# Altium PCB Rajesh_Jasti_17978253_Lab1.PcbDoc
Units mil, origin at the board's own origin, x right, y up, seen from the top; angles counter-clockwise.
Board outline 1680 x 1200 mil, 2 copper layers (Top Layer, Bottom Layer); 33 components, 33 nets, 133 pads, 23 vias.
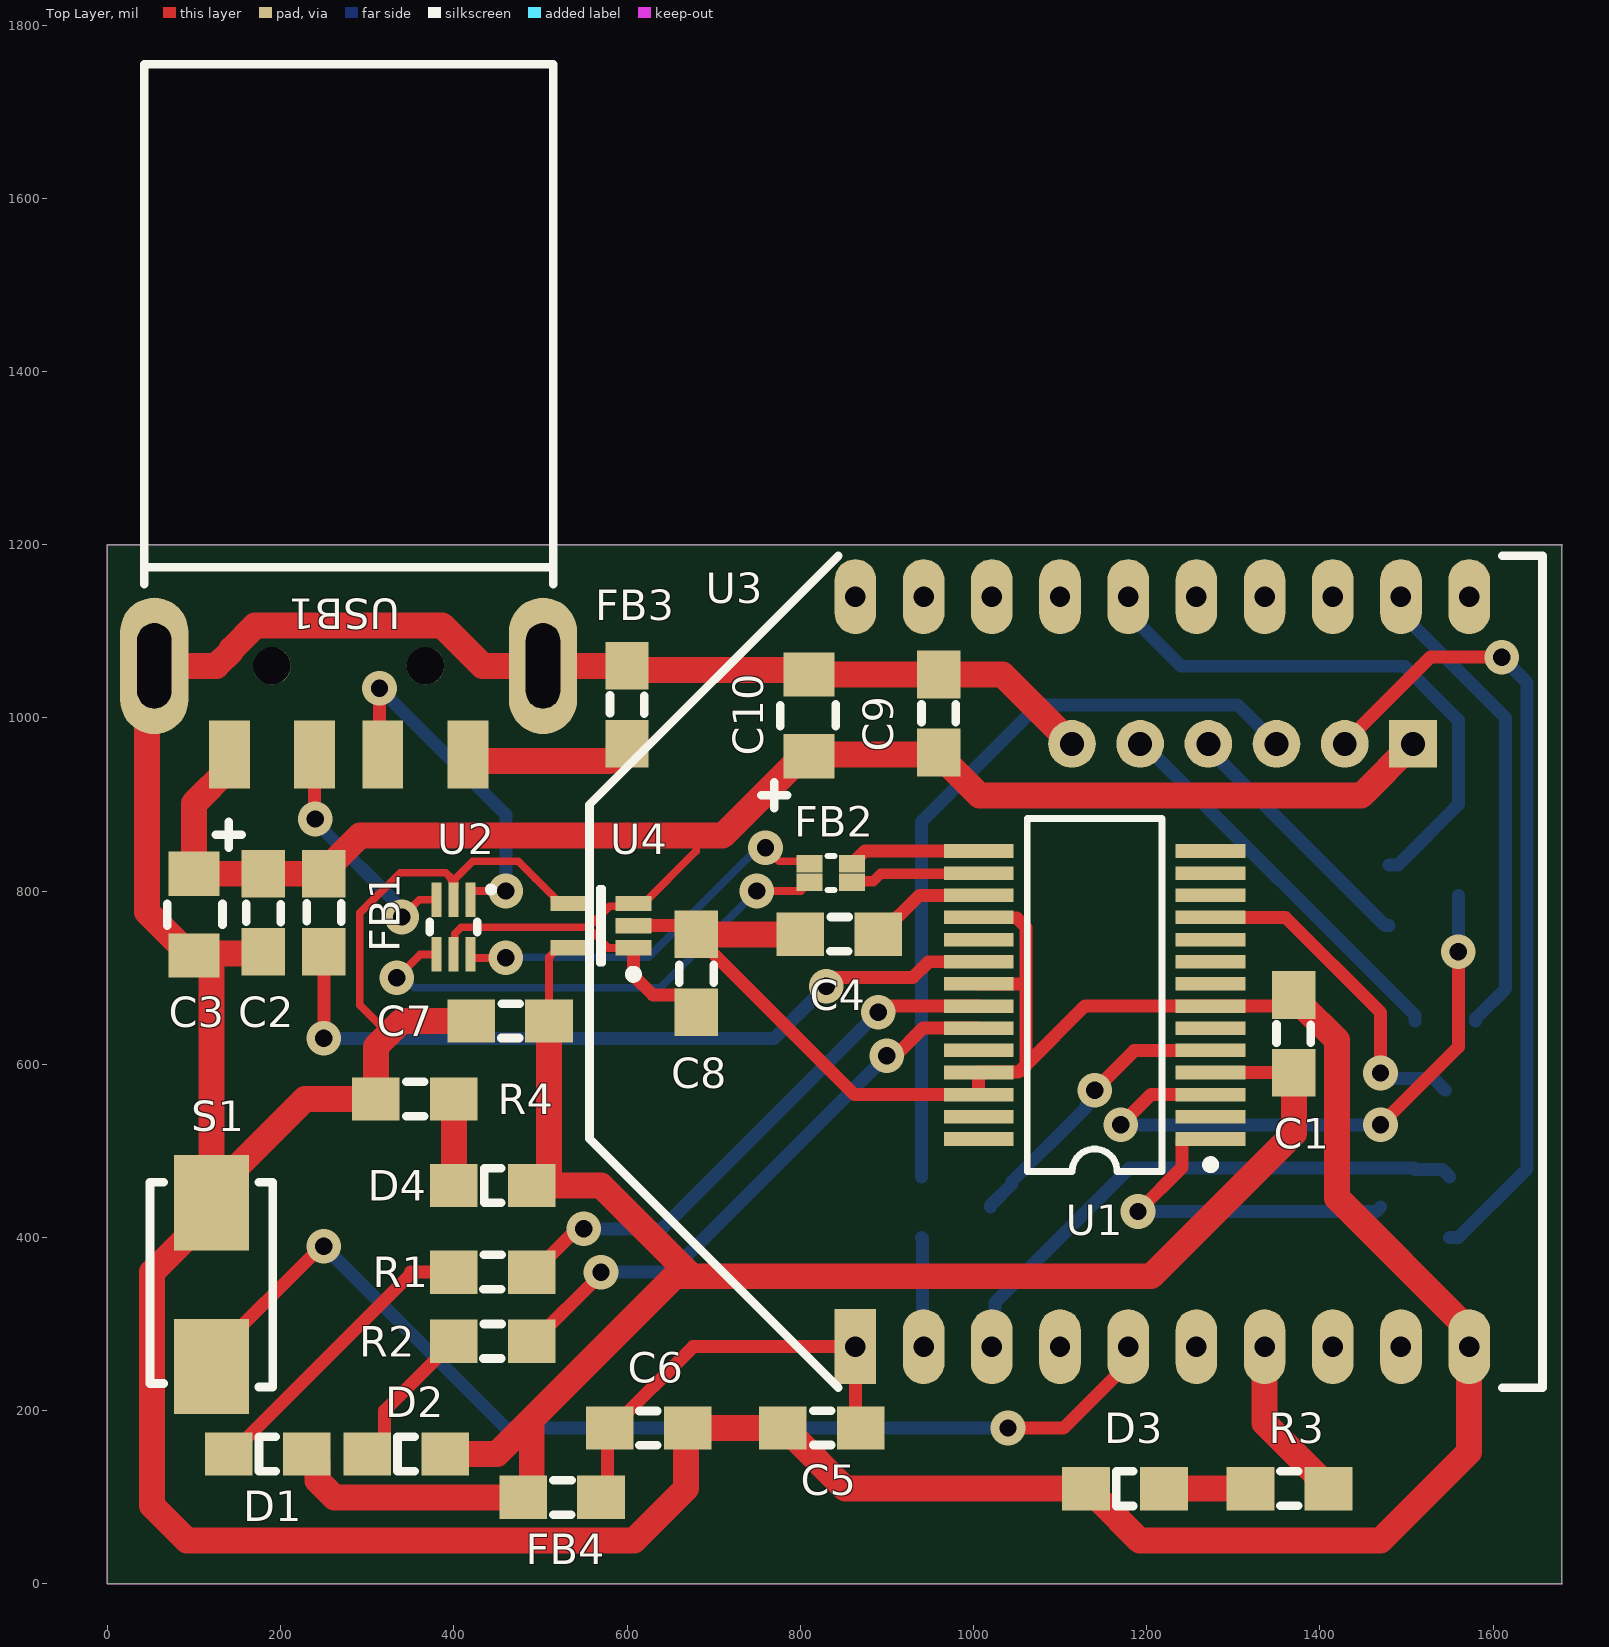
[diagram p0: Top Layer view]
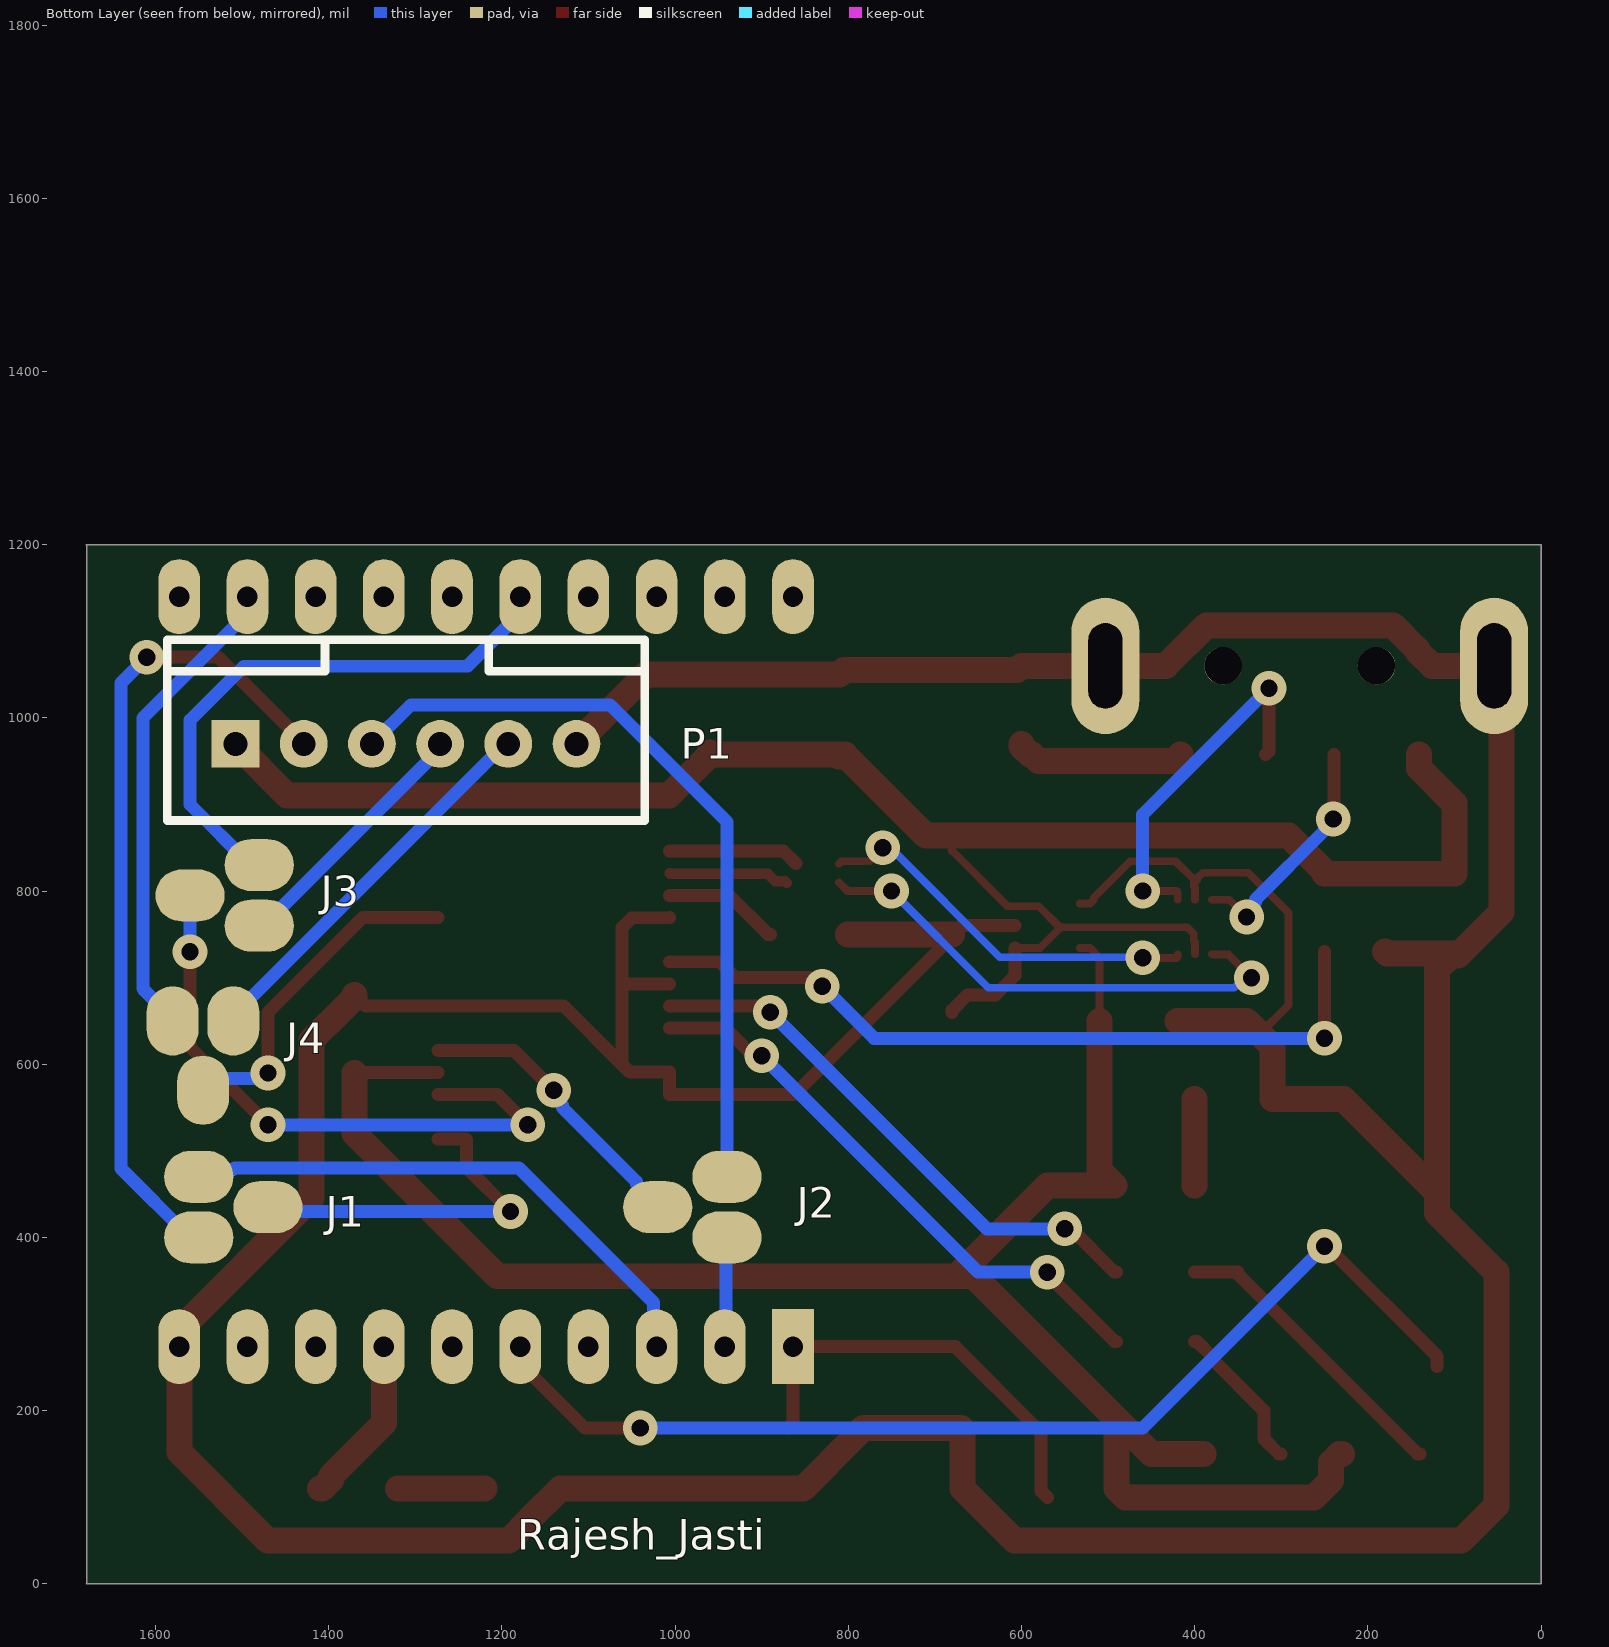
[diagram p1: Bottom Layer view, seen from below]
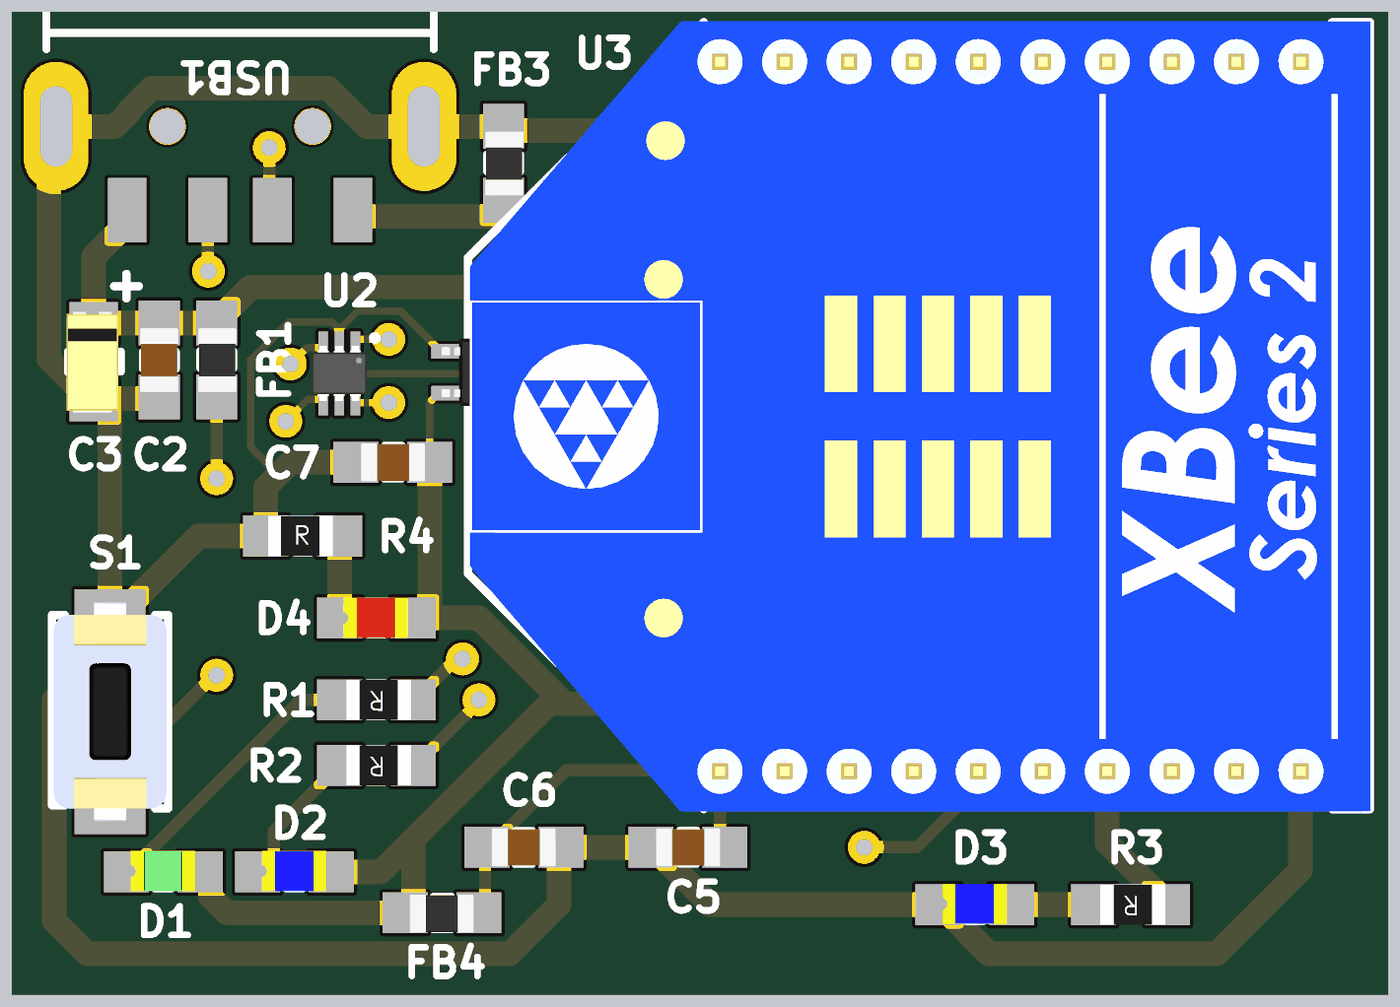
[diagram p2: 3D render of the assembled board from above, using the file's embedded part models]

## Layer stack, top to bottom
Top Solder: solder mask 0.4, Solder Resist, Dk 3.5
Top Layer: signal copper 1.4
Dielectric 1: dielectric 12.6, FR-4, Dk 4.8
Bottom Layer: signal copper 1.4
Bottom Solder: solder mask 0.4, Solder Resist, Dk 3.5

## Board outline
0,0 1680,0 1679.36,0.64 1679.36,1199.36 1680,1200 0,1200

## Design rules (kind name [scope] priority, off if disabled: settings)
Clearance Clearance_1 [All vs (HasFootprint('0504') OR HasFootprint('Jumper1x3') OR HasFootprint('SC70-5') OR HasFootprint('SSOP28W') OR HasFootprint('SOT666'))] p1: gap=7 ignorepadtopadclearanceinfootprint=FALSE
Clearance "Schematic Clearance Constraint_2" [InNet('GND')] p2: gap=10 ignorepadtopadclearanceinfootprint=FALSE
Clearance "Schematic Clearance Constraint_1" [InNet('+5VL')] p3: gap=10 ignorepadtopadclearanceinfootprint=FALSE
Clearance "Schematic Clearance Constraint" [InNet('+3V3')] p4: gap=10 ignorepadtopadclearanceinfootprint=FALSE
Clearance [All] p5: gap=10 ignorepadtopadclearanceinfootprint=FALSE except(0: Arc-Hole Track-Hole SMDPad-Hole THPad-Hole Via-Hole Fill-Hole Poly-Hole Region-Hole Text-Hole)
ComponentClearance ComponentClearance_1 [All vs HasFootprint('XBee')] p1: gap=0 collisioncheckmode=3 verticalgap=0 showdistances=FALSE
ComponentClearance [All] p2: gap=10 collisioncheckmode=3 verticalgap=10 showdistances=FALSE
MinimumSolderMaskSliver [All] p1 off: minsoldermaskwidth=10
PolygonConnect [All] p1: connectstyle=Relief reliefconductorwidth=10 reliefentries=4 polygonreliefangle="90 Angle" airgapwidth=10
RoutingVias [All] p1 off: holewidth=20 width=40 viastyle="Through Hole" minholewidth=20 minwidth=40 maxholewidth=28 maxwidth=50
SilkToSilkClearance [All] p1 off: silktosilkclearance=10
SilkToSolderMaskClearance [IsText] p1 off: minsilkscreentomaskgap=10 clearancetoexposedcopper=TRUE
SolderMaskExpansion [All] p1: expansion=4 istentingtop=FALSE
Width "Schematic Width Constraint_2" [InNet('GND')] p1: maxlimit=30 minlimit=9 preferedwidth=15
Width "Schematic Width Constraint_1" [InNet('+5VL')] p2: maxlimit=30 minlimit=9 preferedwidth=15
Width "Schematic Width Constraint" [InNet('+3V3')] p3: maxlimit=30 minlimit=9 preferedwidth=15
Width [All] p4: maxlimit=30 minlimit=9 preferedwidth=15
26 further rules are at their usual default settings.

## Components (designator, comment, footprint, x,y, rotation, side; value= is the part's Value field where it differs from the comment)
C1 "0.1uF" CAP_0805 1370,590 r90 top
C2 "0.1uF" CAP_0805 180,820 r270 top
C3 "47uF" CAPTAN-A 100,820 r270 top
C4 "0.1uF" CAP_0805 800,750 r0 top
C5 "0.01uF" CAP_0805 780,180 r0 top
C6 "1uF" CAP_0805 670,180 r180 top
C7 "1uF" CAP_0805 420,650 r0 top
C8 "1uF" CAP_0805 680,750 r270 top
C9 "0.1uF" CAP_0805 960,960 r90 top
C10 "47uF" CAPTAN-A 810,955.51 r90 top
D1 "LED-GREEN" LED0805G 230,150 r180 top
D2 "LED-BLUE" LED0805B 390,150 r180 top
D3 "LED-BLUE" LED0805B 1220,110 r180 top
D4 "LED-RED" LED0805R 490,460 r180 top
FB1 "MMZ2012R121A" 0805 250,820 r270 top
FB2 "DLP11SN900HL2L" 0504 810.79,840.51 r0 top
FB3 "MMZ2012R121A" 0805 600,1060 r270 top
FB4 "60OHM" 0805 570,100 r180 top
J1 "Jumper1x3" Jumper1x3 1550,470 r180 bottom
J2 "Jumper1x3" Jumper1x3 940,400 r0 bottom
J3 "Jumper1x3" Jumper1x3 1480,760 r0 bottom
J4 "Jumper1x3" Jumper1x3 1510,650 r270 bottom
P1 "JST 6" PA-6 1113.78,970 r0 bottom
R1 "270" RES_0805 490,360 r180 top
R2 "270" RES_0805 490,280 r180 top
R3 "1k" RES_0805 1410,110 r180 top
R4 "1k" RES_0805 310,560 r0 top
S1 "147873-2" 147873-2 120,440 r270 top
U1 "FT232RL" SSOP28W 1140,680 r90 top
U2 "USBLC6-2P6" SOT666 419.37,790 r180 top
U3 "XBee" XBee 863.78,273.86 r90 top
U4 "TLV70033DCKR" SC70-5 570,760 r180 top
USB1 "USB" "USB-A Plug" 140.79,957.64 r0 top

## Footprints (in the part's own frame and the unit in brackets; to place one, negate y for a bottom-side part, rotate by r counter-clockwise, add the part's x,y. Pads: shape width x height; smd on the part's side, far side on the other; paste and mask are expansions set on the pad)
0504 [mil] "DLP11S"
  rect 30x20 smd: 1(0,-8.86) 2(49.21,-8.86) 3(49.21,-30.51) 4(0,-30.51)
  silkscreen extent 21,-39 29,0, body extent 0,-40 50,0, height 32
0805 [mil] "Body 2.0 x 1.3mm (LxW typ)"
  rect 55x50 smd: 1(0,0) 2(90,0)
  silkscreen extent 34,-20 55,20, body extent 6,-23 85,25, height 37
147873-2 [mm] "TE Connectivity, SMT, Pitch 5.8mm"
  rect 2.8x2.2 smd: 1(0,0) 2(4.8,0)
  silkscreen extent -0.6,-1.8 5.4,1.8, body extent -1,-1.75 5.8,1.75, height 4.3
CAP_0805 [mil] "Body 2.0 x 1.3mm (LxW typ)"
  rect 55x50 smd: 1(0,0) 2(90,0)
  silkscreen extent 35,-20 56,20, body extent 6,-24 85,24, height 47
CAPTAN-A [mm] "Capacitor, SMD Tantalum; Body 3.2 x 1.6 mm (LxW typ)"
  rect 1.3x1.5 smd: 1(0,0) 2(2.4,0)
  silkscreen extent -1.52,-0.79 1.52,1.4, body extent -0.38,-0.84 2.81,0.76, height 1.61
Jumper1x3 [mil]
  oval 80x60 smd: 1(0,0) 2(80,-35) 3(0,-70)
LED0805B [mil] "SMD; Blue LED; Body 2.1 x 1.35 mm"
  rect 55x50 smd: A(0,0) K(90,0)
  silkscreen extent 35,-20 55,20, body extent 6,-26 85,24, height 39
LED0805G [mil] "SMD; Green LED; Body 2.1 x 1.35 mm"
  rect 55x50 smd: A(0,0) K(90,0)
  silkscreen extent 35,-20 55,20, body extent 6,-26 85,24, height 39
LED0805R [mil] "SMD; Red LED; Body 2.1 x 1.35 mm"
  rect 55x50 smd: A(0,0) K(90,0)
  silkscreen extent 35,-20 55,20, body extent 7,-25 85,25, height 39
PA-6 [mm] "PA Connector (JST), 6 Pins, Pitch 2mm"
  rect 1.4x1.4 hole 0.7: 1(10,0)
  round 1.4 hole 0.7: 2(8,0) 3(6,0) 4(4,0) 5(2,0) 6(0,0)
  silkscreen extent -2,-3.05 12,2.25, body extent -2,-3.13 12,2.17, height 7.75
RES_0805 [mil] "Body 2.0 x 1.3mm (LxW typ)"
  rect 55x50 smd: 1(0,0) 2(90,0)
  silkscreen extent 35,-20 56,20, body extent 3,-25 82,24, height 20
SC70-5 [mm] "SOT353, 5-Leads, Body 2x1.3mm, Pitch 0.65mm, Lead Span 2.1mm, IPC Low Density"
  rect 1.05x0.45 smd: 1(-0.95,0.65) 2(-0.95,0) 3(-0.95,-0.65) 4(0.95,-0.65) 5(0.95,0.65)
  silkscreen extent -1.07,-1.1 0.05,1.55, body extent -1.15,-1.05 1.15,1.05, height 1
SOT666 [mm] "OT666, 6-Leads, Body 1.7x1.7mm, Pitch 0.5mm"
  rect 0.3x1 smd: 1(0,0) 2(0.5,0) 3(1,0) 4(1,1.6) 5(0.5,1.6) 6(0,1.6)
  silkscreen extent -0.68,-0.38 1.2,0.95, body extent -0.35,-0.05 1.35,1.65, height 0.6
SSOP28W [mm] "SSOP Wide, 28 Leads; Body Width 5.3 mm; Pitch 0.65 mm"
  rect 0.4x2.05 smd: 1(-4.225,-3.4) 2(-3.575,-3.4) 3(-2.925,-3.4) 4(-2.275,-3.4) 5(-1.625,-3.4) 6(-0.975,-3.4) 7(-0.325,-3.4) 8(0.325,-3.4) 9(0.975,-3.4) 10(1.625,-3.4) 11(2.275,-3.4) 12(2.925,-3.4) 13(3.575,-3.4) 14(4.225,-3.4) 15(4.225,3.4) 16(3.575,3.4) 17(2.925,3.4) 18(2.275,3.4) 19(1.625,3.4) 20(0.975,3.4) 21(0.325,3.4) 22(-0.325,3.4) 23(-0.975,3.4) 24(-1.625,3.4) 25(-2.275,3.4) 26(-2.925,3.4) 27(-3.575,3.4) 28(-4.225,3.4)
  silkscreen extent -5.18,-3.52 5.17,1.98, body extent -5.2,-3.9 5.2,3.9, height 2.15
"USB-A Plug" [mm] "USB-A Plug, Surface Mount Right Angl"
  round 1.1 hole 1.1: 0(1.25,2.6) 0(5.75,2.6)
  rect 1.2x2 smd: 1(0,0) 2(2.5,0) 3(4.5,0) 4(7,0)
  oval 2x4 hole 1 slot 2.5 at 90 deg: 5(-2.2,2.6) 6(9.2,2.6)
  silkscreen extent -2.5,5 9.5,20.25
XBee [mm] "XBee RF Modules"
  rect 2.2x1.22 hole 0.6: 1(0,0)
  oval 2.2x1.22 hole 0.6: 2(0,-2) 3(0,-4) 4(0,-6) 5(0,-8) 6(0,-10) 7(0,-12) 8(0,-14) 9(0,-16) 10(0,-18) 11(22,-18) 12(22,-16) 13(22,-14) 14(22,-12) 15(22,-10) 16(22,-8) 17(22,-6) 18(22,-4) 19(22,-2) 20(22,0)
  silkscreen extent -1.2,-20.15 23.2,7.8, body extent -1.27,-20.16 23.23,7.74, height 3.6

## Part data
C1 C2 C4 C5 C6 C7 C8 C9: library part "CAPN 0805", "Non Polarized Capacitor, SMD, 0805"
C3 C10: library part "CAPP Tan A", "Polarized  Tantalum Capacitor, SMD, Size A"
D1: library part "SMD 0805 LED-GREEN", "GREEN  LED,Case 0805", Supplier Part Number 1=1716766, Supplier 1=Farnell
D2 D3: library part "SMD 0805 LED-BLUE", "BLUE LED, Case 0805", Supplier Part Number 1=1850746, Supplier 1=Farnell
D4: library part "SMD 0805 LED-RED", "RED LED, Case 0805", Supplier Part Number 1=1581239, Supplier 1=Farnell
FB1 FB3: "Choke, 800mA", Supplier Part Number 1=1669720, Supplier 1=Farnell
FB2: "Choke, 150mA, 90ohm at 100MHz", Supplier Part Number 1=2443262, Supplier 1=Farnell
FB4: library part BLM21PG600SN1D, "Choke, 3A, 60ohm at 100MHz", Supplier Part Number 1=1515665, Supplier 1=Farnell
J1 J2 J3 J4: "Header, Plug, 2.54mm, 3 Pins, Right Angle"
P1: library part "JST PA Header 6", "JST PA Header, 6-Pin, Pitch 2mm", Supplier Part Number 1=1830742, Supplier 1=Farnell
R1 R2 R3 R4: library part "Resistor 0805", "Resistor, SMD, 0805"
S1: "Momentary Contact Switch", Supplier Part Number 1=506-147873-2, Supplier 1=Mouser
U1: "FTDI - FT232RL - USB TO UART, SMD", Supplier Part Number 1=1146032, Supplier 1=Farnell
U2: "Very  Loe Capactance ESD Protection", Supplier Part Number 1=1295310, Supplier 1=Farnell
U3: "XBee/XBee-PRO RF Modules", Supplier Part Number 1=1337912, Supplier 1=Farnell
U4: "Single Output LDO, 200 mA, Fixed 3.3 V Output, 2 to 5.5 V Input, with Low IQ, 5-pin SC70 (DCK), -40 to 125 degC, Green (RoHS & no Sb/Br)", Supplier Part Number 1=296-32413-1-ND, Supplier 1=Digi-Key
USB1: library part USB-A/Plug, "USB TYPE A CONNECTOR Plug 4POS SMD", Supplier Part Number 1=1308875, Supplier 1=Element14

## Via types
v1: diameter 40, hole 20, Top Layer to Bottom Layer, 23 vias

## Nets (pads, with @x,y where several pads share a name; then routed paths per layer and width w, separated by ;. In a path a pad name is that pad's centre, name@x,y a point inside that pad or via, vN(x,y) a via of type N, cw(c..) or ccw(c..) an arc to the next point about the centre after c; other vN are vias at no path point)
#DM: FB2.3 U1.16 | length 139.8
  Top Layer w12: FB2.3@871.04,809.3 872.94,811.2 879.71,811.2 879.97,811.45 884.32,811.45 892.82,819.95 1005.35,819.95 U1.16
$DM: FB2.4 U2.4 | length 588.6
  Top Layer w9: v1(334.3,700) 360.95,726.65 378.59,726.65 378.95,727.01 U2.4 ; v1(750,800) 800.79,800 FB2.4
  Bottom Layer w9: v1(334.3,700) 342.69,700 354.31,688.37 638.37,688.37 v1(750,800)
$DP: FB2.1 U2.6 | length 455
  Top Layer w9: U2.6 419.37,724.28 420.78,722.87 v1(460,722.87) ; v1(760,850) 775.55,834.45 807.99,834.45 FB2.1
  Bottom Layer w9: v1(460,722.87) 460.82,723.69 624.9,723.69 751.21,850 v1(760,850)
+3V3: C1.1 C7.2 D1.A D2.A D4.A FB4.2 U1.4 U4.5 | length 2200
  Top Layer w9: C7.2 510,723.62 520.79,734.41 U4.5
  Top Layer w15: U1.4 1369.57,590.43 C1.1
  Top Layer w30: D1.A 232.5,150 242.5,140 242.5,119.64 262.14,100 FB4.2 490,110 490,190 ; D2.A 450,150 490,190 ; C7.2 510,477.5 492.5,460 570,460 665,365 674.77,355.23 ; C1.1 1370,520 1205.23,355.23 674.77,355.23 ; 490,190 655.23,355.23 674.77,355.23
+5VL: C2.1 C3.1 C8.2 C9.1 C10.1 FB1.1 P1.1 U2.5 U4.1 U4.3 USB1.1 | length 2212.9
  Top Layer w9: U2.5 399.69,740.79 401.09,742.19 401.09,750.58 408.7,758.19 554.61,758.19 578.39,734.41 U4.1 ; 555.42,758 579.9,782.47 616.09,782.47 680,846.38 680,864
  Top Layer w15: U4.1 607.4,702.6 630,680 662.5,680 680,662.5 C8.2
  Top Layer w30: USB1.1 140.79,941.89 100,901.1 C3.1 C2.1 FB1.1 250,822.5 291.5,864 680,864 710.36,864 803.84,957.48 C10.1@808.03,957.48 ; C10.1 812.24,957.76 957.76,957.76 C9.1 960,957.5 1007.16,910.34 1447.82,910.34 P1.1
C\T\S: J4.2 U1.11 | length 404.8
  Top Layer w15: U1.11 1360.43,769.57 1470,660 v1@1470,580
  Bottom Layer w15: v1(1470,590) 1476.76,590 1483.03,583.73 1531.27,583.73 J4.2
C\T\S-UART: J4.1 P1.5 | length 453.7
  Bottom Layer w15: P1.5 1196.26,970 1510,656.26 J4.1
C\T\S-wireless: J4.3 U3.12 | length 554.3
  Bottom Layer w15: U3.12 1493.7,1120.71 1614.5,999.91 1614.5,687.32 1580,652.82 J4.3
DM: U2.3 USB1.2 | length 277.7
  Top Layer w9: v1(340,770) 360,790 U2.3
  Top Layer w15: USB1.2 239.21,884.02 v1(240,883.24)
  Bottom Layer w15: v1(240,883.24) 250.05,873.18 250.05,869.95 329.95,790.05 329.95,786.82 340,776.76 v1(340,770)
DP: U2.1 USB1.3 | length 422.5
  Top Layer w9: U2.1 419.37,798.59 420.78,800 v1(460,800)
  Top Layer w15: v1(314.17,1034.17) 314.17,961.42 USB1.3
  Bottom Layer w15: v1(314.17,1034.17) 399.87,948.46 460,888.34 v1(460,800)
GND: C1.2 C2.2 C3.2 C4.1 C5.1 C6.1 C7.1 C8.1 C9.2 C10.2 D3.K FB3.1 P1.6 R4.1 S1.1 U1.7 U1.18 U1.21 U1.25 U1.26 U2.2 U3.10 U4.2 U4.4 USB1.5 USB1.6 | length 6787.4
  Top Layer w9: 325,635 291.5,668.5 291.5,774.63 338.06,821.19 390.67,821.19 397.41,814.45 397.41,812.6 398.28,811.72 ; U2.2 399.69,803.78 401.09,805.19 401.09,813.57 422.02,834.5 474.29,834.5 494.5,814.29 516.43,792.36 516.43,789.95 520.79,785.59 U4.4
  Top Layer w15: U4.2 670,760 C8.1 680,747.5 862.66,564.84 U1.26 U1.25 1006.52,590.81 1052.21,590.81 1061,599.59 ; U1.21 1006.52,692.42 1058.29,692.42 1058.97,691.74 1061,691.74 ; U1.18 1006.52,769.19 1049.66,769.19 1061,757.86 1061,691.74 ; C1.2 1357.2,667.2 U1.7 1128.61,667.2 1061,599.59 ; 1061,599.59 1061,691.74
  Top Layer w30: C2.2 177.76,727.76 98.31,727.76 C3.2@96.06,725.51 ; C7.1 340,650 325,635 310,620 R4.1 228.19,560 S1.1@120,451.81 ; C8.1 C4.1 ; P1.6 1033.78,1050 C9.2 C10.2 805,1055 605,1055 FB3.1 USB1.6 433.14,1060 386.49,1106.65 170.68,1106.65 143.35,1079.32 143.35,1077.57 125.77,1060 USB1.5 45.47,1051.3 45.47,776.1 C3.2@96.06,725.51 ; C1.2 1370,677.5 1401.21,646.29 1401.57,646.29 1420,627.86 1420,445.59 1572.44,293.15 U3.10 1572.44,152.44 1470,50 1192.14,50 1167.5,74.64 1167.5,75 1132.5,110 D3.K 852.14,110 792.5,169.64 792.5,170 782.5,180 C5.1 C6.1 667.86,177.86 667.86,110 607.86,50 92.14,50 51.69,90.45 51.69,359.88 120,428.19 S1.1 S1.1@120,451.81 ; C3.2@96.06,725.51 C3.2 103.94,725.51 120,709.45 S1.1@120,451.81
NetC4_2: C4.2 U1.17 | length 134.8
  Top Layer w15: C4.2 892.5,750 937.66,795.16 U1.17
NetC5_2: C5.2 C6.2 FB4.1 U3.1 | length 504.7
  Top Layer w15: FB4.1 577.5,107.5 577.5,180 C6.2 582.5,180 676.36,273.86 U3.1 863.78,186.22 C5.2
NetD1_K: D1.K R1.2 | length 348.4
  Top Layer w15: D1.K 142.5,150 350,357.5 350,360 R1.2
NetD2_K: D2.K R2.2 | length 174.4
  Top Layer w15: D2.K 302.5,150 320,167.5 320,200 380,260 380,262.5 397.5,280 R2.2
NetD3_A: D3.A R3.2 | length 100
  Top Layer w30: D3.A R3.2
NetD4_K: D4.K R4.2 | length 100
  Top Layer w30: D4.K R4.2
NetFB1_2: FB1.2 U1.20 | length 892.8
  Top Layer w15: v1(250,630) FB1.2 ; v1(830,690) 833.52,690 843.52,700 888.25,700 888.35,700.1 930.1,700.1 948.39,718.39 U1.20
  Bottom Layer w15: v1(250,630) 770,630 v1(830,690)
NetFB2_2: FB2.2 U1.15 | length 152.2
  Top Layer w15: FB2.2 874.69,846.34 U1.15
NetFB3_2: FB3.2 USB1.4 | length 196.5
  Top Layer w30: USB1.4 424.02,950 580,950 587.5,957.5 590,957.5 600,967.5 FB3.2
NetR1_1: R1.1 U1.22 | length 643.4
  Top Layer w15: R1.1 492.5,360 542.5,410 v1(550,410) ; v1(890,660) 895.59,660 902.8,667.2 U1.22
  Bottom Layer w15: v1(550,410) 640,410 v1(890,660)
NetR2_1: R2.1 U1.23 | length 667.4
  Top Layer w15: R2.1 492.5,280 570,357.5 v1(570,360) ; v1(900,610) 910,610 941.61,641.61 U1.23
  Bottom Layer w15: v1(570,360) 650,360 v1(900,610)
NetR3_1: R3.1 U3.7 | length 195.9
  Top Layer w30: U3.7 1336.22,185.55 1397.5,124.27 1397.5,120 1407.5,110 R3.1
NetS1_2: S1.2 U3.5 | length 1260.4
  Top Layer w15: S1.2 120,262.84 247.17,390 v1(250,390) ; v1(1040,180) 1104.17,180 1178.74,254.57 U3.5
  Bottom Layer w15: v1(250,390) 460,180 710,180 v1(1040,180)
R\T\S: J3.2 U1.3 | length 720.6
  Top Layer w15: v1(1170,530) 1204.84,564.84 U1.3 ; v1(1470,530) 1560,620 v1(1560,730)
  Bottom Layer w15: v1(1170,530) v1(1470,530) ; v1(1560,730) J3.2
R\T\S-UART: J3.1 P1.4 | length 299
  Bottom Layer w15: P1.4 1271.26,964.37 1475.63,760 J3.1
R\T\S-Wireless: J3.3 U3.16 | length 658
  Bottom Layer w15: U3.16 1178.74,1120.71 1239.85,1059.6 1497.75,1059.6 1560,997.35 1560,900 1490,830 J3.3
RX: J1.2 U1.1 | length 419.5
  Top Layer w15: v1(1190,430) 1241,481 1241,513.29 1241.38,513.66 U1.1
  Bottom Layer w15: v1(1190,430) 1465,430 J1.2
RX-UART: J1.3 P1.2 | length 948.5
  Top Layer w15: P1.2 1428.74,971.13 1527.61,1070 v1(1610,1070)
  Bottom Layer w15: J1.3 1560,400 1639.5,479.5 1639.5,1040.5 v1(1610,1070)
TX: J2.2 U1.5 | length 337.6
  Top Layer w15: v1(1140,570) 1185.65,615.65 1273.48,615.65 U1.5
  Bottom Layer w15: J2.2 1020,437.18 1044.62,461.8 1044.62,464.62 1129.95,549.95 1129.95,553.18 1140,563.24 v1(1140,570)
TX-UART: J2.3 P1.3 | length 894.6
  Bottom Layer w15: J2.3 940,880 1075.06,1015.06 1304.94,1015.06 P1.3
Wireless-RX: J1.1 U3.3 | length 646
  Bottom Layer w15: U3.3 1025.1,277.69 1025.1,325.1 1180,480 1508.71,480 1510.1,478.61 1541.39,478.61 J1.1
Wireless-TX: J2.1 U3.2 | length 127.2
  Bottom Layer w15: J2.1 941.26,398.74 941.26,275.12 U3.2
pads on no net: U1.2 U1.6 U1.8 U1.9 U1.10 U1.12 U1.13 U1.14 U1.19 U1.24 U1.27 U1.28 U3.4 U3.6 U3.8 U3.9 U3.11 U3.13 U3.14 U3.15 U3.17 U3.18 U3.19 U3.20 USB1.0

## Keep-outs
Keep-Out Layer:
  the board outline again, w1

## Silkscreen, mask and mechanical layers (free items; w line width, h text height)
Bottom Overlay:
  text "Rajesh_Jasti" at 1182,39.66 h35
Mechanical 1:
  the board outline again, w25